# Altium PCB SignalAnalyse.PcbDoc (part 1 of 2)
Units mil, origin at the board's own origin, x right, y up, seen from the top; angles counter-clockwise.
Board outline 4784 x 1800 mil, 2 copper layers (Top Layer, Bottom Layer); 103 components, 57 nets, 390 pads, 59 vias.
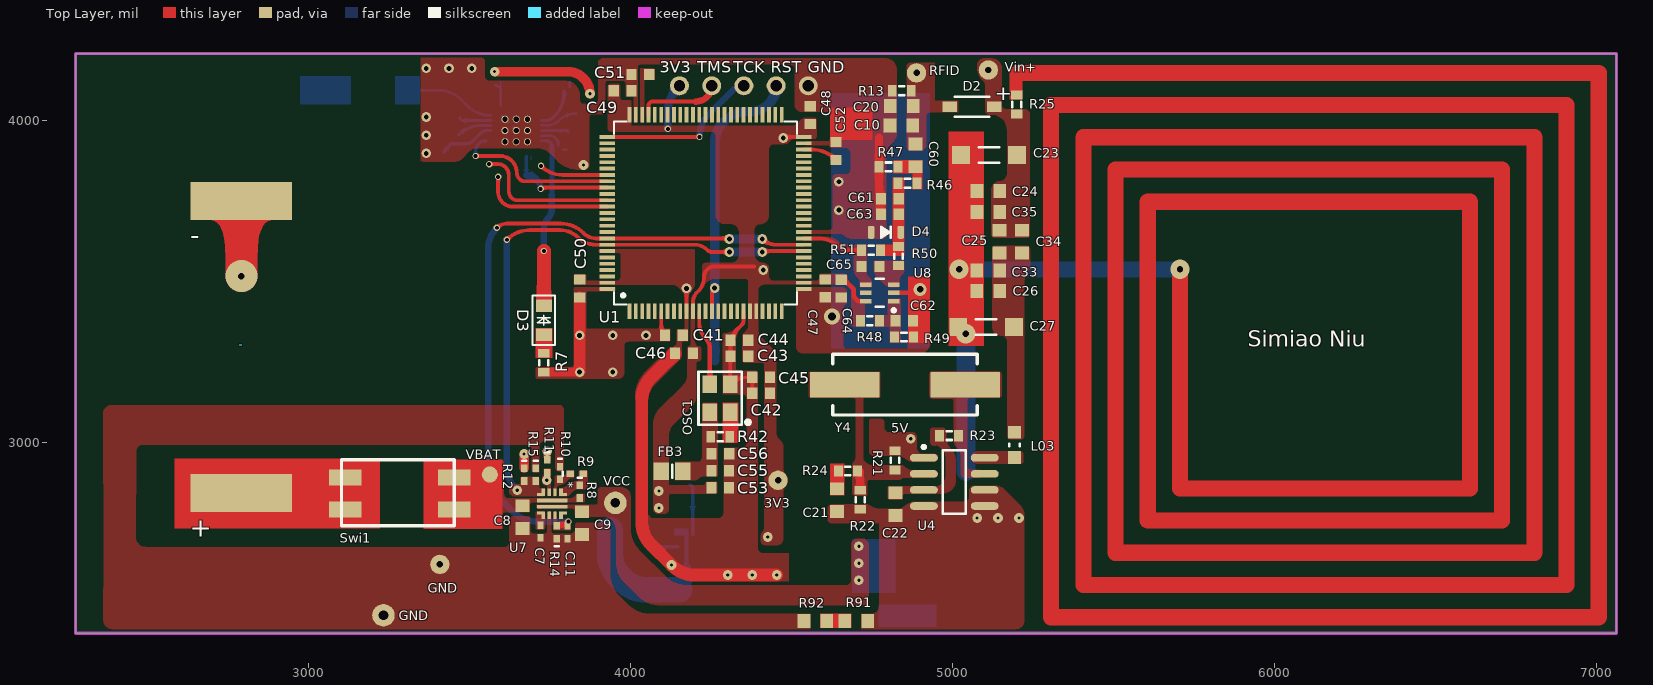
[diagram p0: Top Layer view]
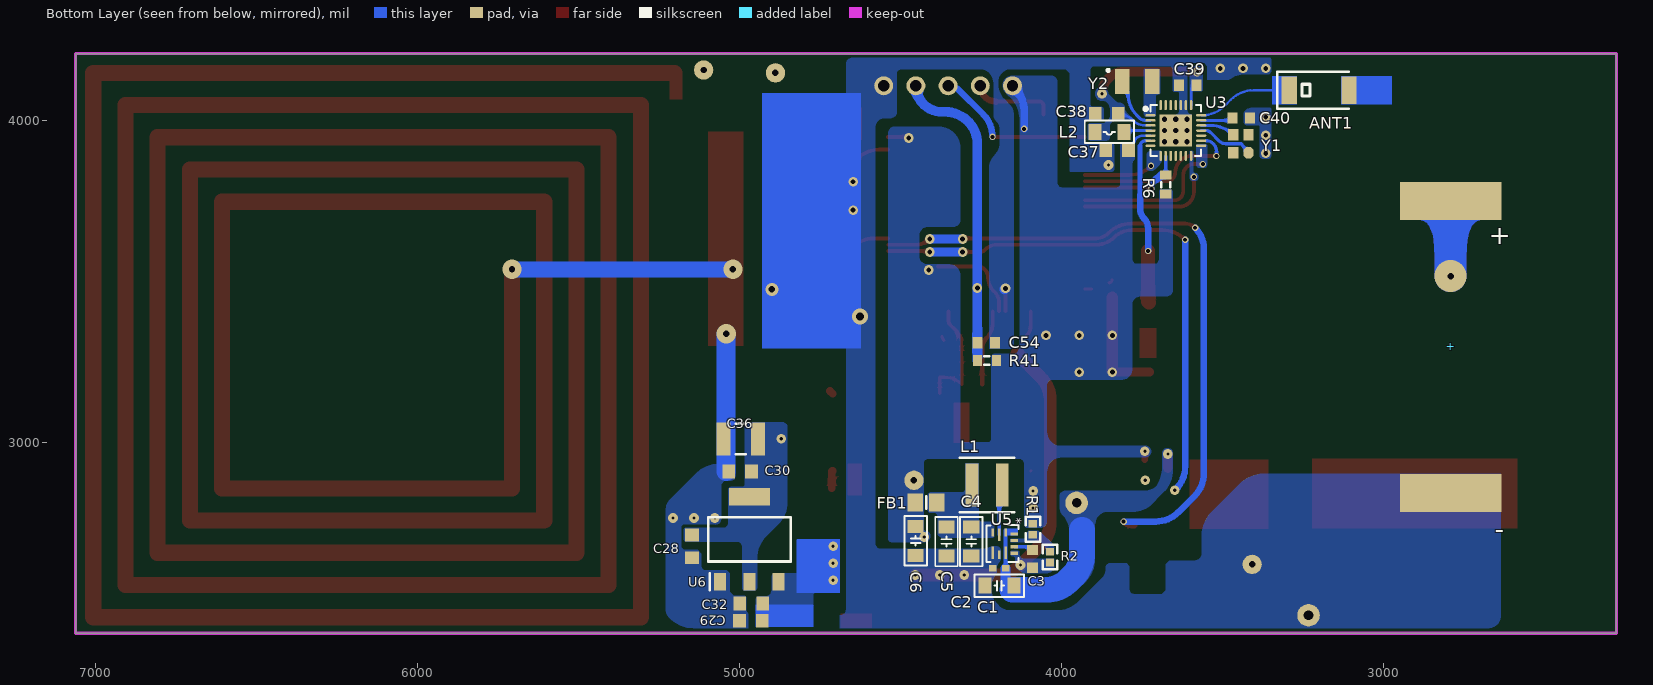
[diagram p1: Bottom Layer view, seen from below]

## Layer stack, top to bottom
Top Solder: solder mask 0.4, Solder Resist, Dk 3.5
Top Layer: signal copper 1.4
Dielectric1: dielectric 12.6, FR-4, Dk 4.8
Bottom Layer: signal copper 1.4
Bottom Solder: solder mask 0.4, Solder Resist, Dk 3.5

## Board outline
2277,2407 7061,2407 7061,4207 2277,4207

## Design rules (kind name [scope] priority, off if disabled: settings)
Clearance [All] p1: gap=3 ignorepadtopadclearanceinfootprint=FALSE except(0: Arc-Hole Track-Hole SMDPad-Hole THPad-Hole Via-Hole Fill-Hole Poly-Hole Region-Hole Text-Hole)
PlaneClearance [All] p1: clearance=15
PlaneConnect [All] p1: planeconnectstyle=Direct reliefexpansion=20 reliefentries=4 reliefconductorwidth=10 reliefairgap=10
PolygonConnect [All] p1: connectstyle=Direct reliefconductorwidth=10 reliefentries=4 polygonreliefangle="90 Angle" airgapwidth=10
RoutingVias [All] p1: holewidth=15 width=30 viastyle="Through Hole" minholewidth=8 minwidth=20 maxholewidth=50 maxwidth=80
SolderMaskExpansion [All] p1: expansion=4
Width [All] p1: maxlimit=100 minlimit=7 preferedwidth=10
28 further rules are at their usual default settings.

## Classes and differential pairs
component class SignalAnalyse: ANT1 C37 C38 C39 C40 C41 C42 C43 C44 C45 C46 C47 C48 C49 C50 C51 C52 C53 C54 C55 C56 C60 C61 C62 C63 C64 C65 D3 D4 FB3 L2 OSC1 R6 R7 R41 R42 R46 R47 R48 R49 R50 R51 U1 U3 U8 Y1 Y2
component class RFID_transmitter_V2: + - C1 C2 C3 C4 C5 C6 C7 C8 C9 C10 C11 C20 C21 C22 C23 C24 C25 C26 C27 C28 C29 C30 C32 C33 C34 C35 C36 FB1 L1 L03 R1 R2 R8 R9 R10 R11 R12 R13 R14 R15 R21 R22 R23 R24 R25 R91 R92 Swi1 U4 U5 U6 U7 Y4

## Components (designator, comment, footprint, x,y, rotation, side; value= is the part's Value field where it differs from the comment)
+ "Battery" Battery 2792,3296 r270 bottom (schematic designator BT2)
- "Battery" Battery 2792,3296 r90 top (schematic designator BT1)
ANT1 "2450AT42A100E" ANTC5020X110N 3200,4093 r180 bottom
C1 "Multilayer Ceramic Capacitor" C0805 4193,2555 r0 bottom
C2 "Cap Semi" 0402 4193.31,2609 r180 bottom
C3 "Cap Semi" 1608[0603] 4090,2638 r90 bottom
C4 "Multilayer Ceramic Capacitor" C0805 4280,2692 r270 bottom
C5 "Multilayer Ceramic Capacitor" C0805 4357,2692 r270 bottom
C6 "Multilayer Ceramic Capacitor" C0805 4453,2694 r270 bottom
C7 "Cap Semi" 0402 3720.55,2723.02 r90 top
C8 "Cap Semi" 0603 3665,2768 r90 top
C9 "Cap Semi" 0603 3849,2749 r90 top
C10 "Cap 100n" 0603 4841,3984 r180 top
C11 "Cap Semi" 0402 3804.55,2720.7 r90 top
C20 "Cap 100n" 0603 4842,4044 r180 top
C21 "Cap 820p" 0603 4641,2820.57 r90 top
C22 "Cap 200p" 0603 4822,2808 r90 top
C23 "Cap Var" Variable_Capacitor_JZ400HV1 5113,3892 r0 top
C24 "Cap" 0603 5111,3780 r0 top
C25 "Cap" 0603 5146,3623 r270 top
C26 "random value needs carefully address" 0603 5110.57,3470 r180 top
C27 "Cap Var" Variable_Capacitor_JZ400HV1 5104,3358 r0 top
C28 "Cap 100n" 0603 5147,2677 r90 bottom
C29 "Cap 10u" 0603 4964,2446 r180 bottom
C30 "Cap 22u" 0603 4998,2910 r180 bottom
C32 "Cap 10n" 0603 4963,2499 r180 bottom
C33 "random value needs carefully address" 0603 5110.57,3533 r180 top
C34 "Cap" 0603 5215,3623 r270 top
C35 "Cap" 0603 5111,3715 r0 top
C36 "C3225C0G1H104JT000N" C1210 4996,3010 r0 bottom
C37 "GRM188R61A226ME15D" 0603 3827.56,3908 r180 bottom
C38 "GRM188R61A226ME15D" 0603 3859.44,4020 r180 bottom
C39 "GRM188R61A226ME15D" 1608[0603] 3608.06,4108 r0 bottom
C40 "GRM188R61A226ME15D" 1608[0603] 3442,4007 r0 bottom
C41 "GRM188R61A226ME15D" 1608[0603] 4134.44,3333 r0 top
C42 "GRM188R61A226ME15D" 1608[0603] 4405.44,3152 r180 top
C43 "GRM188R61A226ME15D" 1608[0603] 4338,3267 r0 top
C44 "GRM188R61A226ME15D" 1608[0603] 4338,3317 r0 top
C45 "GRM188R61A226ME15D" 1608[0603] 4405.44,3202 r180 top
C46 "GRM188R61A226ME15D" 1608[0603] 4166,3276 r0 top
C47 "GRM188R61A226ME15D" 1608[0603] 4605,3478 r90 top
C48 "GRM188R61A226ME15D" 1608[0603] 4558,4016 r270 top
C49 "GRM188R61A226ME15D" 1608[0603] 3975.44,4092 r180 top
C50 "GRM188R61A226ME15D" 1608[0603] 3843,3477.44 r270 top
C51 "GRM188R61A226ME15D" 1608[0603] 4030.44,4142 r0 top
C52 "GRM188R61A226ME15D" 1608[0603] 4638,3904.44 r270 top
C53 "GRM188R61A226ME15D" 1608[0603] 4278.56,2859 r180 top
C54 "GRM188R61A226ME15D" 1608[0603] 4233.44,3309 r180 bottom
C55 "GRM188R61A226ME15D" 1608[0603] 4278.56,2912 r0 top
C56 "GRM188R61A226ME15D" 1608[0603] 4279,2964 r0 top
C60 "Cap Ceramic" 0603 4885,3891 r270 top
C61 "Cap Semi" 1608[0603] 4805,3756 r0 top
C62 "Cap Semi" 1608[0603] 4850,3377 r180 top
C63 "Cap Semi" 1608[0603] 4805,3708 r0 top
C64 "Cap Semi" 1608[0603] 4654,3477 r90 top
C65 "" 1608[0603] 4745,3546 r0 top
D2 "Diode" SOD3716X135N 5060.1,4042 r0 top
D3 "LED-Green" D0805 3731,3379 r90 top
D4 "TDZ3V0J" SOD-323 4793,3652 r0 top
FB1 "Beed" BEADC2012X110N 4420.54,2813 r0 bottom
FB3 "Bead" BEADC2012X110N 4129,2910 r180 top
L1 "XGL4030" XGL4030 4231,2868 r180 bottom
L2 "22uH" L0805 3851,3964 r0 bottom
L03 "Inductor 220 nH" Ferrite_bead_0805inch_2012mm 5192,2992 r90 top
OSC1 "16MHz" OSC_3.2X2.5 4278,3137 r90 top
R1 "14.7KΩ ±1%" LC-0402_R 4089,2730 r90 bottom
R2 "4.7KΩ ±1%" LC-0402_R 4036,2643.73 r90 bottom
R6 "Res 2.2KΩ ±1%" J1-0603 3676,3800 r90 bottom
R7 "Res 2.2KΩ ±1%" J1-0603 3731,3247 r90 top
R8 "Res 2.2KΩ ±1%" 0402-A 3842.55,2846.7 r270 top
R9 "Res 2.2KΩ ±1%" 0402-A 3833,2902 r0 top
R10 "Res 2.2KΩ ±1%" 0402-A 3780.99,2905 r270 top
R11 "Res 2.2KΩ ±1%" 0402-A 3741,2925.69 r270 top
R12 "Res 2.2KΩ ±1%" 0402-A 3669.55,2899.7 r270 top
R13 "Res 12.7KΩ ±1%" J1-0603 4842,4092 r0 top
R14 "Res 2.2KΩ ±1%" 0402-A 3770.55,2720.7 r90 top
R15 "Res 2.2KΩ ±1%" 0402-A 3705.55,2899.7 r270 top
R21 "Res 2.2KΩ ±1%" J1-0603 4821.15,2944.15 r90 top
R22 "Res 2.2KΩ ±1%" J1-0603 4713,2821.57 r90 top
R23 "Res 2.2KΩ ±1%" J1-0603 4989,3021 r0 top
R24 "Res 2.2KΩ ±1%" J1-0603 4675,2911 r180 top
R25 "Res 2.2KΩ ±1%" J1-0603 5199,4049 r90 top
R41 "Res 2.2KΩ ±1%" J1-0603 4231.47,3254 r180 bottom
R42 "Res 2.2KΩ ±1%" J1-0603 4278.47,3017 r180 top
R46 "" J1-0603 4860,3804 r180 top
R47 "" J1-0603 4801,3855 r180 top
R48 "" J1-0603 4743,3377 r180 top
R49 "" J1-0603 4849,3327 r0 top
R50 "" J1-0603 4832,3578 r90 top
R51 "" J1-0603 4747,3596 r0 top
R91 "Magnetic Beed" 0603 4701,2445 r180 top
R92 "Magnetic Beed" 0603 4574,2445 r180 top
Swi1 "Switch_219-2MSTR" Switch_219-2MSTR 3453,2841 r90 top
U1 "STM32F767VIT6" STM32F767VIT6 4233,3712 r90 top
U3 "CH9143" QFN28_4X4 3644.98,3968.03 r270 bottom
U4 "LT1016" LT1016_SOIC 5005.16,2877.15 r0 top
U5 "XPS62912RPUR" VQFN-HR10_RPU_TEX 4183.12,2685.5 r270 bottom
U6 "LT1117IST-5#PBF" SOT230P700X180-4N 4969,2699 r90 bottom
U7 "LM73100RPWR" VQFN-HR-10_2X2_TEX 3756.55,2809.54 r270 top
U8 "OPA607" OPA607IDCKR 4774,3464 r180 top
Y1 "32M" SMD2016-4N 3443,3927 r270 bottom
Y2 "32.768K" Q13FC1350000400 3765.06,4120 r180 bottom
Y4 "CRYSTAL" HC-49SMD 4852,3179 r180 top

## Footprints (in the part's own frame and the unit in brackets; to place one, negate y for a bottom-side part, rotate by r counter-clockwise, add the part's x,y. Pads: shape width x height; smd on the part's side, far side on the other; paste and mask are expansions set on the pad)
0402 [mm] "Chip Capacitor, Body 1.0x0.5mm, IPC High Density"
  rect 0.6x0.5 smd: 1(-0.5,0) 2(0.5,0)
  body extent -0.55,-0.3 0.55,0.3, height 1.3
0402-A [mm] "Chip Inductor, Body 1.0x0.5mm, IPC High Density"
  rect 0.6x0.5 smd: 1(-0.5,0) 2(0.5,0)
  silkscreen extent -1.1,-0.15 -1.1,0.15, body extent -0.55,-0.3 0.55,0.3, height 0.55
0603 [mm] "0603Resistor_Capacitor"
  rect 1x1.1 smd: 1(-0.9,0) 2(0.9,0)
  body extent -0.77,-0.45 0.77,0.45, height 0.45
1608[0603] [mm] "Chip Capacitor, Body 1.6x0.8mm, IPC High Density"
  rect 0.8x0.9 smd: 1(-0.7,0) 2(0.7,0)
  body extent -0.87,-0.48 0.87,0.48, height 1.3
ANTC5020X110N [mm]
  rect 1.2x2.2 smd: 1(-2.35,0) 2(2.35,0)
  silkscreen extent -3.3,-1.45 2.35,1.45, body extent -2.5,-1 2.5,1, height 1.1
Battery [mm]
  rect 3x8 smd: 1(-11.508,0) 2(11.508,0)
BEADC2012X110N [mm]
  rect 1.2x1.4 smd: 1(-0.85,0) 2(0.85,0)
  silkscreen extent 0,-0.5 0,0.5, body extent -1,-0.6 1,0.6, height 1.1
C0805 [mil]
  rect 40x50 smd: 1(45,0) 2(-45,0)
  silkscreen extent -77,-35 77,35, body extent -49,-24 49,25, height 31
C1210 [mm] "Chip Capacitor, Body 3.2x2.5mm, IPC High Density"
  rect 1.1x2.6 smd: 1(-1.35,0) 2(1.35,0)
  silkscreen extent -0.4,-1.2 0.4,1.2, body extent -1.7,-1.35 1.7,1.35, height 1.3
D0805 [mil]
  rect 40x50 smd: 1(-45,0) 2(45,0)
  silkscreen extent -77,-35 77,35, body extent -40,-25 40,25, height 43
Ferrite_bead_0805inch_2012mm [mm] "Ferrite_bead_MH2029-300Y"
  rect 1x1 smd: 1(-1,0) 2(1,0)
  silkscreen extent -0.1,-0.4 0.1,0.4, body extent -1.1,-0.7 1.1,0.7, height 1.1
HC-49SMD [mm] "HC49/4HSMX"
  rect 5.5x2 smd: 1(-4.75,0) 2(4.75,0)
  silkscreen extent -5.7,-2.4 5.7,2.4, body extent -6.7,-2.46 6.7,2.44, height 4.3
J1-0603 [mm] "Chip Resistor, Body 1.6x0.8mm, IPC High Density"
  rect 0.7x0.9 smd: 1(-0.75,0) 2(0.75,0)
  silkscreen extent -0.2,-0.35 0.2,0.35, body extent -0.85,-0.48 0.85,0.48, height 0.9
L0805 [mil]
  rect 40x50 smd: 1(45,0) 2(-45,0)
  silkscreen extent -77,-35 77,35, body extent -49,-24 49,25, height 31
LC-0402_R [mm]
  rect 0.6x0.65 smd mask+0.051: 1(-0.425,0) 2(0.425,0)
  silkscreen extent -0.97,-0.58 0.97,0.58, body extent -0.57,-0.27 0.57,0.28, height 0.41
LT1016_SOIC [mm] "LT1016_Comparator_SOIC"
  oval 2.2x0.6 smd: 1(-2.4,1.905) 2(-2.4,0.635) 3(-2.4,-0.635) 4(-2.4,-1.905) 5(2.4,-1.905) 6(2.4,-0.635) 7(2.4,0.635) 8(2.4,1.905)
  silkscreen extent -2.52,-2.5 0.9,2.88, body extent -2,-2.5 2,2.5, height 1.76
OPA607IDCKR [mm] "Opamp"
  rect 0.9x0.35 smd: 1(-1.1,0.65) 2(-1.1,0) 3(-1.1,-0.65) 4(1.1,-0.65) 5(1.1,0) 6(1.1,0.65)
  silkscreen extent -1.23,-1.1 0.3,1.5, body extent -0.7,-1.1 0.7,1.1, height 1.1
OSC_3.2X2.5 [mm] "SG-310SCF SMD-3225_4P"
  rect 1.4x1.15 smd: 1(-1.1,-0.8) 2(1.1,-0.8) 3(1.1,0.8) 4(-1.1,0.8)
  silkscreen extent -2.1,-2.35 2.1,1.7, body extent -1.6,-1.25 1.6,1.25, height 0.61
Q13FC1350000400 [mm] "FC-135, 2-Leads, Body 1.50x3.20mm, Pitch 2.35mm, IPC Medium Density"
  rect 1.15x1.95 smd: 1(-1.175,0) 2(1.175,0)
  silkscreen extent -2.39,0.79 -2.19,0.99, body extent -1.67,-0.9 1.68,0.9, height 0.9
QFN28_4X4 [mm]
  round 0.559 hole 0.406: 0(-0.888,-0.89) 0(-0.888,-0.002) 0(-0.888,0.885) 0(0.001,-0.89) 0(0.001,-0.002) 0(0.001,0.885) 0(0.89,-0.89) 0(0.89,-0.002) 0(0.89,0.885)
  rect 2.54x2.54 smd: 0(0,0)
  oval 0.2x0.8 smd: 1(-1.2,-2) 2(-0.8,-2) 3(-0.4,-2) 4(0,-2) 5(0.4,-2) 6(0.8,-2) 7(1.2,-2) 15(1.2,2) 16(0.8,2) 17(0.4,2) 18(0,2) 19(-0.4,2) 20(-0.8,2) 21(-1.2,2)
  oval 0.8x0.2 smd: 8(2,-1.2) 9(2,-0.8) 10(2,-0.4) 11(2,0) 12(2,0.4) 13(2,0.8) 14(2,1.2) 22(-2,1.2) 23(-2,0.8) 24(-2,0.4) 25(-2,0) 26(-2,-0.4) 27(-2,-0.8) 28(-2,-1.2)
  silkscreen extent -2,-2.51 2,2
SMD2016-4N [mm]
  oct 0.9x0.8 smd: 1(0.7,0.6)
  rect 0.9x0.8 smd: 2(-0.7,0.6) 3(-0.7,-0.6) 4(0.7,-0.6)
  body extent -0.85,-1 0.85,1, height 0.5
SOD3716X135N [mm]
  rect 1.15x0.8 smd: 1(-1.75,0) 2(1.75,0)
  silkscreen extent -1.35,-0.8 1.35,0.8, body extent -1.86,-0.8 1.86,0.8, height 1.35
SOD-323 [mil]
  rrect50% 20x40 smd: 1(-46,0) 2(46,0)
  silkscreen extent -16,-18 16,18, body extent -51,-27 51,27, height 43
SOT230P700X180-4N [mm]
  rect 1.35x0.95 smd: 1(-3.35,2.3) 2(-3.35,0) 3(-3.35,-2.3)
  rect 1.35x3.25 smd: 4(3.35,0)
  silkscreen extent -4.03,-3.25 1.75,3.25, body extent -3.5,-3.25 3.5,3.25, height 1.8
STM32F767VIT6 [mm] "LQPF100, 100-Leads, Body 14.00x14.00mm, Pitch 0.50mm, IPC Medium Density"
  rect 1.2x0.3 smd: 1(-7.75,6) 2(-7.75,5.5) 3(-7.75,5) 4(-7.75,4.5) 5(-7.75,4) 6(-7.75,3.5) 7(-7.75,3) 8(-7.75,2.5) 9(-7.75,2) 10(-7.75,1.5) 11(-7.75,1) 12(-7.75,0.5) 13(-7.75,0) 14(-7.75,-0.5) 15(-7.75,-1) 16(-7.75,-1.5) 17(-7.75,-2) 18(-7.75,-2.5) 19(-7.75,-3) 20(-7.75,-3.5) 21(-7.75,-4) 22(-7.75,-4.5) 23(-7.75,-5) 24(-7.75,-5.5) 25(-7.75,-6) 51(7.75,-6) 52(7.75,-5.5) 53(7.75,-5) 54(7.75,-4.5) 55(7.75,-4) 56(7.75,-3.5) 57(7.75,-3) 58(7.75,-2.5) 59(7.75,-2) 60(7.75,-1.5) 61(7.75,-1) 62(7.75,-0.5) 63(7.75,0) 64(7.75,0.5) 65(7.75,1) 66(7.75,1.5) 67(7.75,2) 68(7.75,2.5) 69(7.75,3) 70(7.75,3.5) 71(7.75,4) 72(7.75,4.5) 73(7.75,5) 74(7.75,5.5) 75(7.75,6)
  rect 0.3x1.2 smd: 26(-6,-7.75) 27(-5.5,-7.75) 28(-5,-7.75) 29(-4.5,-7.75) 30(-4,-7.75) 31(-3.5,-7.75) 32(-3,-7.75) 33(-2.5,-7.75) 34(-2,-7.75) 35(-1.5,-7.75) 36(-1,-7.75) 37(-0.5,-7.75) 38(0,-7.75) 39(0.5,-7.75) 40(1,-7.75) 41(1.5,-7.75) 42(2,-7.75) 43(2.5,-7.75) 44(3,-7.75) 45(3.5,-7.75) 46(4,-7.75) 47(4.5,-7.75) 48(5,-7.75) 49(5.5,-7.75) 50(6,-7.75) 76(6,7.75) 77(5.5,7.75) 78(5,7.75) 79(4.5,7.75) 80(4,7.75) 81(3.5,7.75) 82(3,7.75) 83(2.5,7.75) 84(2,7.75) 85(1.5,7.75) 86(1,7.75) 87(0.5,7.75) 88(0,7.75) 89(-0.5,7.75) 90(-1,7.75) 91(-1.5,7.75) 92(-2,7.75) 93(-2.5,7.75) 94(-3,7.75) 95(-3.5,7.75) 96(-4,7.75) 97(-4.5,7.75) 98(-5,7.75) 99(-5.5,7.75) 100(-6,7.75)
  silkscreen extent -7.23,-7.23 7.23,7.23, body extent -8,-8 8,8, height 1.6
Switch_219-2MSTR [mil]
  rect 50x100 smd: 1(-50,0) 2(50,0) 3(-50,339) 4(50,339)
  silkscreen extent -100,0 105,350
Variable_Capacitor_JZ400HV1 [mm] "Variable_Capacitor_JZ400HV"
  rect 1.4x1.4 smd: 1(-2.2,0) 2(2.2,0)
  silkscreen extent -0.8,-0.6 0.8,0.6, body extent -3.3,-1.72 3.05,1.73, height 1.45
VQFN-HR10_RPU_TEX [mil]
  rect 26x8 smd paste-4 mask+0: 1(-34.5,9.88) 3(-34.5,-29.62) 5(34.5,-9.88)
  rect 39x8 smd: 2(-28,-9.87) 4(28,-29.63) 6(28,9.87)
  rect 10x22 smd: 7(29.63,36.37) 8(9.88,36.38) 9(-9.87,36.38) 10(-29.62,36.38)
  silkscreen extent -57,-50 57,50, body extent -41,-40 41,40, height 39
VQFN-HR-10_2X2_TEX [mm]
  rrect17% 0.6x0.3 smd paste+0 mask+0.05: 1(-0.9,0.7) 4(-0.9,-0.7) 7(0.9,-0.7) 10(0.9,0.7)
  rrect20% 0.25x0.6 smd paste+0 mask+0.05: 1(-0.725,0.875) 4(-0.725,-0.875) 7(0.725,-0.875) 10(0.725,0.875)
  rrect20% 0.6x0.25 smd paste+0 mask+0.05: 2(-0.9,0.225) 3(-0.9,-0.225) 8(0.9,-0.225) 9(0.9,0.225)
  rrect17% 0.3x2.4 smd paste+0 mask+0.05: 5(-0.25,0) 6(0.25,0)
  body extent -1,-1 1,1, height 1
XGL4030 [mm] "Precision Wire Wound Inductor, 2-Leads, Body 4.00x4.00mm, IPC Medium Density"
  rect 1x3.4 smd: 1(-1.185,0) 2(1.185,0)
  silkscreen extent -2.15,-2.15 2.15,2.15, body extent -2.15,-2.15 2.15,2.15, height 3

## Part data
+ -: "Multicell Battery"
ANT1: "Antenna"
C1 C4 C5 C6 C60: library part C-Ceramic
C2 C3 C9 C61 C62 C63 C64: "Capacitor (Semiconductor SIM Model)"
C7: "多层陶瓷电容器MLCC - SMD/SMT 1.3nF 50VDC X7R 5% 0402"
C8: "多层陶瓷电容器MLCC - SMD/SMT 0603 1uF 25V X6S 10%"
C10 C20: library part "Cap Semi", "Capacitor"
C11: "多层陶瓷电容器MLCC - SMD/SMT 100nF 10VDC X5R 5% 0402"
C21 C22 C28 C29 C30 C32: library part Cap, "Capacitor"
C23 C27: "Variable or Adjustable Capacitor"
C24 C25 C34 C35: "Capacitor_for resonance"
C26 C33: library part Cap, "Capacitor_for resonance"
C36 C37 C38 C39 C40 C41 C42 C43 C44 C45 C46 C47 C48 C49 C50 C51 C52 C53 C54 C55 C56 C65: library part "Cap Semi", "Capacitor (Semiconductor SIM Model)"
D2: library part MBR0540T1G, "Surface Mount Schottky Power Rectifier"
D3: library part LED
D4: library part "D Zener", "Zener Diode 3V"
FB1 FB3: library part 782853200, "Wurth Ferrite Bead"
L1: library part Inductor, "Coilcraft Shielded Power Inductors"
L2: library part FB
L03: library part Component_1, "220nH"
OSC1: library part OSC2, "OSC with disable function"
R1 R2: library part "0402 1KΩ (1001) 1%", "贴片电阻"
R6 R7 R8 R9 R10 R11 R12 R14 R15 R21 R22 R23 R24 R25 R41 R42 R46 R47 R48 R49 R50 R51: library part Res1, "Resistor"
R13: library part Res3, "Resistor"
R91 R92: library part Res1, "Wurth Magnetic Bead"
U3: "Bluetooth-LowEnergy & UART & USB Mutual Transport"
U5 U7: "No Description Available"
U8: library part TSV620AILT
Y1: library part X201632MMB4SI, "Quartz Crystal Oscillator"
Y2: library part Q13FC1350000400, "Crystal Oscillator"
Y4: "Industry standard SMD crystal"

## Free pads (board coordinates)
  round 70 hole 30: 0(3233,2463) 0(3953,2812)
  round 60 hole 20: 0(3408,2621) 0(4458,2882) 2(4888,4147) 2(5111,4156)
  round 59.06 hole 35.43: 1(4152,4107) 2(4252,4107) 3(4352,4107) 4(4452.01,4107) 5(4552.01,4107)
  round 50 smd: 2(3563,2900)

## Via types
v1: diameter 30, hole 15, Top Layer to Bottom Layer, tented both sides, 21 vias
v2: diameter 30, hole 10, Top Layer to Bottom Layer, tented both sides, 19 vias
v3: diameter 20, hole 12, Top Layer to Bottom Layer, tented both sides, 11 vias
v4: diameter 60, hole 20, Top Layer to Bottom Layer, 3 vias
v5: diameter 30, hole 10, Top Layer to Bottom Layer, 2 vias
v6: diameter 40, hole 20, Top Layer to Bottom Layer, 1 vias
v7: diameter 50, hole 25, Top Layer to Bottom Layer, 1 vias
v8: diameter 100, hole 20, Top Layer to Bottom Layer, 1 vias

## Nets (pads, with @x,y where several pads share a name; then routed paths per layer and width w, separated by ;. In a path a pad name is that pad's centre, name@x,y a point inside that pad or via, vN(x,y) a via of type N, cw(c..) or ccw(c..) an arc to the next point about the centre after c; other vN are vias at no path point)
3.3V: C6.2 C37.2 C41.1 C42.1 C43.2 C44.2 C45.1 C46.2 C47.2 C48.2 C49.2 C50.2 C53.2 C64.2 FB1.2 FB3.2 pad.0@4458,2882 pad.1 R1.2 R6.1 R7.1 R11.1 R41.2 R48.2 U1.6 U1.11 U1.20 U1.21 U1.27 U1.50 U1.75 U1.100 U3.5 U8.6 | length 1169.8
  Top Layer w10: U1.100@3905.52,3475.78 U1.100@3927.88,3475.78 ; FB3.2@4095,2912 FB3.2@4096,2911 ; C44.2@4365.56,3317 ccw(c4352.92,3329.64) C44.2@4370.8,3329.64
  Top Layer w11.81: U1.6@4095.2,3406.88 4095.2,3361.19 ccw(c4135.07,3361.19) C41.1@4106.88,3333 ; U1.11@4193.63,3406.88 4193.63,3433.72 cw(c4239.28,3433.72) 4207,3466 4210.32,3469.32 ccw(c4167.64,3512) 4228,3512 cw(c4262,3512) 4262,3546 4383,3546
  Top Layer w12: v1(4474,3945) cw(c4477.22,3945) 4477.22,3948.22 U1.50@4538.12,3948.22
  Top Layer w13.78: C64.2@4666,3502 4693,3475 4693,3452 4706.59,3438.41 U8.6@4730.69,3438.41
  Top Layer w20: R11.1@3741,2945.37 v2(3741,2972)
  Top Layer w27.56: R7.1@3726,3218.53 v1@3840.73,3218.53
  Top Layer w35.43: v1@3840.73,3218.53 ccw(c3835.24,3224.02) 3843,3224.02 C50.2@3843,3449.88
  Bottom Layer w8: U3.5@3723.72,3952.28 3747.72,3952.28 cw(c3747.72,3924) 3776,3924 C37.2@3776,3923 ; C37.2@3792,3908 C37.2@3800,3908
  Bottom Layer w23.62: v3(4116,3973) 4116,4029.58 cw(c4216,4029.58) 4145.29,4100.29 pad.1@4152,4107
  other v1: 3842,3218 3945,3218 3842,3332 3945,3332 4048,3332 4412,3535
  other v2: 4426,2706 4088,2796 4088,2849
ADC: C65.1 R51.1 U1.34 U8.4 | length 189.3
  Top Layer w11.81: U1.34@4538.12,3633.26 4582.6,3633.26 cw(c4582.6,3543.6) 4646,3607 ccw(c4672.56,3633.56) 4672.56,3596 R51.1@4717.47,3596
ANT: ANT1.1 U3.21 | length 297.3
  Bottom Layer w7.32: ANT1.1@3292.52,4093 3403.58,4093 cw(c3403.58,3993) 3474.29,4063.71 3493.44,4044.56 ccw(c3564.15,4115.28) 3564.15,4015.28 U3.21@3566.24,4015.28
BT_AT: U1.82 U3.8 | length 224.9
  Top Layer w11.81: v3(3722,3858) ccw(c3789.33,3925.33) 3789.33,3830.11 U1.82@3927.88,3830.11
  Bottom Layer w0: U3.8@3692.22,3877.78 U3.8@3692.22,3889.29
BT_RST: U1.83 U3.16 | length 519.9
  Top Layer w11.81: v3(3519,3889) 3595,3889 cw(c3595,3837) 3647,3837 ccw(c3673.57,3837) 3673.57,3810.43 U1.83@3927.88,3810.43
  Bottom Layer w10: v3(3519,3889) 3519,3903.93 cw(c3551.61,3903.93) 3519.47,3909.46 cw(c3551.61,3903.93) 3547.12,3936.23 cw(c3551.61,3903.93) U3.16@3551.61,3936.54
BT_RXD: U1.86 U3.15 | length 453.1
  Top Layer w11.81: v3(3561,3864) 3588,3864 cw(c3588,3830) 3622,3830 3622,3779 ccw(c3649.63,3779) 3640.28,3753 ccw(c3649.63,3779) 3649.63,3751.37 U1.86@3927.88,3751.37
BT_STA: R6.2 U1.84 U3.9 | length 337.7
  Top Layer w11.81: v3(3721,3787) 3724.74,3790.74 U1.84@3927.88,3790.74
  Bottom Layer w8: R6.2@3676,3829.53 R6.2@3676.48,3830
  Bottom Layer w10: R6.2@3676.48,3830 U3.9@3676.48,3889.29
  Bottom Layer w19.68: R6.2@3676,3829.53 3678.47,3829.53 cw(c3678.47,3787) v3(3721,3787)
BT_TXD: U1.87 U3.14 | length 411.7
  Top Layer w11.81: v3(3589,3824) 3589,3777 ccw(c3634.31,3777) 3634.31,3731.69 U1.87@3927.88,3731.69
FB: R1.1 R2.2 U5.9
GND: +.2 C1.1 C2.1 C3.1 C4.1 C5.1 C6.1 C7.1 C8.1 C9.1 C10.2 C11.1 C20.2 C37.1 C38.1 C39.2 C40.1 C41.2 C42.2 C43.1 C44.1 C45.2 C46.1 C47.1 C48.1 C49.1 C50.1 C51.1 C52.1 C53.1 C54.2 C55.2 C56.2 C61.1 C62.1 C63.1 C64.1 D4.1 OSC1.2 pad.0@3233,2463 pad.0@3408,2621 pad.5 R2.1 R10.1 R13.1 R14.1 R15.1 R47.2 R49.2 R92.2 U1.10 U1.19 U1.26 U1.35 U1.49 U1.74 U1.94 U1.99 U3.0 U3.23 U3.24 U5.4 U5.5 U5.7 U7.8 U8.2 | length 1755
  Top Layer w10: C50.1@3843,3505 ccw(c3852.54,3505) C50.1@3852.54,3495.46 ; C44.1@4310.44,3317 C43.1@4310.44,3267 ccw(c4312.72,3264.72) 4309.5,3264.72 OSC1.2@4309.5,3180.31 cw(c4361.87,3127.94) 4361.87,3202 C45.2@4377.88,3202 C42.2@4377.88,3152 C42.2@4378,3151.88
  Top Layer w11.81: U1.10@4173.94,3406.88 4173.94,3477.94 v1(4174,3478)
  Top Layer w12: C44.1@4310.44,3317 cw(c4325.99,3317) C44.1@4315,3328 ; C44.1@4321,3330 cw(c4345.14,3330) 4328.06,3347.06 4345.24,3364.24 ccw(c4331.08,3378.41) 4351.11,3378.41 U1.19@4351.11,3406.88 ; C52.1@4634.54,3928.54 ccw(c4634.54,3932) C52.1@4638,3932
  Top Layer w25: C61.1@4771.47,3753.97 R47.2@4771.47,3855 4771.47,3946.47 ; C63.1@4774.44,3709.56 C61.1@4774.44,3751
  Top Layer w40: C46.1@4138.44,3276 4064.29,3201.85 ccw(c4135,3131.14) 4035,3131.14 4035,2752.42 ccw(c4135,2752.42) 4064.29,2681.71 v2(4127,2619) 4128.71,2617.29 ccw(c4199.42,2688) 4199.42,2588 v2(4302,2588) v2(4378,2588) v2(4454,2588)
  Bottom Layer w31.5: v1(4174,3478) v1@4176.59,3475.41
  other v1: 4647,3721 4647,3809 3366,3897 3366,3953.5 3366,4010 3366,4161 3436.5,4161 3507,4161
  other v2: 3854,3861
  other v6: 4899,3475
  other v7: 4625,3391
GND_RF: C21.1 C22.1 C23.1 C24.1 C26.2 C27.1 C28.1 C29.1 C30.1 C32.1 C33.2 C35.1 C36.2 R22.1 R25.2 R91.1 U4.4 U4.5 U4.6 U6.1 | length 26907
  Top Layer w50: 5201,4147 7006,4147 7006,2457 5306,2457 5306,4047 6906,4047 6906,2557 5406,2557 5406,3947 6806,3947 6806,2657 5506,2657 5506,3847 6706,3847 6706,2757 5606,2757 5606,3747 6606,3747 6606,2857 5706,2857 v4(5706,3537)
  Bottom Layer w50: v4(5020,3537) v4(5706,3537)
  Bottom Layer w60: C30.1@5041.43,2910 v4@5041.43,3336
  other v2: 5076,2765 5141,2765 5206,2765
  other v4: 5041,3337
IMON: C11.2 R14.2 U1.33 U1.92 U7.9 | length 2106.5
  Top Layer w11.81: v3(3585,3666) cw(c3616.38,3634.62) 3616.38,3679 3783.58,3679 cw(c3783.58,3579) 3854.29,3649.71 3855,3649 ccw(c3893,3687) 3893,3633.26 U1.92@3927.88,3633.26 4301.54,3633.26 cw(c4301.54,3625.54) v1(4307,3631) ; v1(4409,3631) ccw(c4451.07,3673.07) 4451.07,3613.57 U1.33@4538.12,3613.57
  Top Layer w20: R14.2@3774,2743 3780.44,2743 ccw(c3780.44,2780.56) v3(3807,2754)
  Bottom Layer w20: v3(3585,3666) ccw(c3650.18,3600.82) 3558,3600.82 3558,2903.42 ccw(c3658,2903.42) 3587.29,2832.71 3636.71,2783.29 ccw(c3707.42,2854) 3707.42,2754 v3(3807,2754)
  Bottom Layer w27.56: v1(4307,3631) v1(4409,3631)
NetBT1_1: -.1 Swi1.3 Swi1.4 | length 21.2
  Top Layer w30: -.1@2792,2862.93 -.1@2807,2847.93
NetBT1_2: +.1 -.2 | length 426.1
  Top Layer w100: v8(2792,3516) -.2@2792,3729.07
  Bottom Layer w100: v8(2792,3516) +.1@2792,3729.07
NetC3_2: C3.2 U5.8 | length 62.5
  Bottom Layer w10: C3.2@4090,2665.56 cw(c4100.07,2665.56) 4100.07,2675.62 U5.8@4146.75,2675.62
NetC4_2: C4.2 C5.2 FB1.1 L1.1 U5.3
NetC7_2: C7.2 U7.7
NetC21_2: C21.2 R24.2
NetC22_2: C22.2 R23.1 U4.3
NetC25_2: C25.2 C26.1 C27.2 C33.1 C34.2 L03.2
NetC40_2: C40.2 U3.20 | length 99.8
  Bottom Layer w8: C40.2@3469.56,4007 C40.2@3477.03,3999.53
  Bottom Layer w10: C40.2@3477.03,3999.53 U3.20@3566.24,3999.53
NetC51_2: C51.2 U1.73
NetC52_2: C52.2 U1.48 | length 108.8
  Top Layer w10: C52.2@4635.32,3879.56 C52.2@4638,3876.88
  Top Layer w11.81: U1.48@4538.12,3908.85 4564.61,3908.85 cw(c4564.61,3808.85) C52.2@4635.32,3879.56
NetC55_1: C55.1 C56.1 FB3.1 OSC1.4 R42.2
NetC60_2: C60.2 R46.1 R47.1
NetC61_2: C61.2 C63.2 D4.2 R46.2 R50.2 R51.2
NetC62_2: C62.2 R48.1 R49.1 U8.1
NetC65_2: C65.2 R50.1 U8.3
NetD3_1: D3.1 R7.2
NetD3_2: D3.2 U3.6 | length 535.2
  Top Layer w44: D3.2@3728,3434 3731,3437 v3(3731,3594)
  Bottom Layer w8: U3.6@3723.72,3936.54 U3.6@3738.46,3936.54
  Bottom Layer w10: U3.6@3738.46,3936.54 cw(c3738.46,3919) 3756,3919
  Bottom Layer w16: 3756,3769 3756,3919
  Bottom Layer w20: v3(3731,3594) 3731,3665 cw(c3772.04,3665) 3743.02,3694.02 ccw(c3711.69,3725.36) 3756,3725.36 3756,3769
NetL1_2: L1.2 U5.2 | length 159.4
  Bottom Layer w8: L1.2@4184.35,2868 cw(c4184.35,2859.35) L1.2@4193,2859.35
  Bottom Layer w12: U5.2@4193,2713.5 L1.2@4193,2859.35
NetL2_2: L2.2 U3.4 | length 84.6
  Bottom Layer w8: U3.4@3723.72,3968.03 3801.97,3968.03 cw(c3801.97,3964) L2.2@3806,3964
NetL03_1: L03.1 U4.8
NetOSC1_1: OSC1.1 R42.1
NetOSC1_3: OSC1.3 U1.12 | length 235.4
  Top Layer w11.81: U1.12@4213.31,3406.88 4213.31,3370.52 ccw(c4280.52,3370.52) 4233,3323
  Top Layer w14: 4233,3323 cw(c4200.4,3290.4) 4246.5,3290.4 OSC1.3@4246.5,3180.31
NetR8_1: R8.1 R9.2 U7.1
NetR9_1: R9.1 R10.2 U7.2
NetR21_1: R21.1 R22.2 R24.1 U4.2 Y4.2 | length 67.6
  Top Layer w24: R24.1@4710.43,2911 cw(c4710.43,2908.43) 4713,2908.43 4713,2904.77 R22.2@4713,2857 ; Y4.2@4710.43,3150.43 Y4.2@4719,3159
NetR23_2: R23.2 U4.7 Y4.1
NetR91_2: R91.2 R92.1
NetU3_1: U3.1 Y2.2
NetU3_2: U3.2 Y2.1 | length 149
  Bottom Layer w8: Y2.1@3811.32,4101.75 Y2.1@3811.32,4120
  Bottom Layer w10: U3.2@3723.72,3999.53 3738.55,3999.53 ccw(c3738.55,4028.45) 3759,4008 3764.71,4013.71 ccw(c3694,4084.42) 3794,4084.42 Y2.1@3794,4091
NetU3_18: U3.18 Y1.1 | length 175.2
  Bottom Layer w8: Y1.1@3419.38,3899.44 Y1.1@3419.38,3899.8
  Bottom Layer w10: Y1.1@3419.38,3899.44 3442.13,3926.87 ; 3442,3927 3491,3927 ccw(c3491,3953.56) 3509.78,3934.78 3537,3962 cw(c3551.56,3947.44) 3551.56,3968.03 U3.18@3566.24,3968.03
NetU3_19: U3.19 Y1.3 | length 107.4
  Bottom Layer w10: Y1.3@3466.62,3954.56 cw(c3537.17,3884.02) 3537.17,3983.78 U3.19@3566.24,3983.78
PG: R11.2 U7.3
  other v5: 3740,2882
PGTH: R12.2 R15.2 U1.32 U1.93 U7.4 | length 1737
  Top Layer w11.81: v3(3616,3629) 3616.71,3629.71 cw(c3687.42,3559) 3687.42,3659 3781.47,3659 cw(c3781.47,3580.47) 3837,3636 ccw(c3891.14,3690.14) 3891.14,3613.57 U1.93@3927.88,3613.57 4199.4,3613.57 cw(c4199.4,3560.4) 4237,3598 ccw(c4253.9,3614.9) 4253.9,3591 v1(4307,3591) ; v1(4409,3591) cw(c4411.89,3591) 4411.89,3593.89 U1.32@4538.12,3593.89
  Bottom Layer w20: v3(3616,3629) 3616,2924.42 ccw(c3716,2924.42) 3645.29,2853.71 v2(3648,2851)
  Bottom Layer w27.56: v1(4307,3591) v1(4409,3591)
R\S\T\: C54.1 pad.4 R41.1 U1.14 | length 1040.7
  Top Layer w11.81: U1.14@4252.68,3406.88 4252.68,3458.93 cw(c4281.07,3458.93) v1(4261,3479)
  Bottom Layer w30: R41.1@4261,3254 C54.1@4261,3309 v1(4261,3479) 4261,3926 cw(c4361,3926) 4361,4026 4371.01,4026 ccw(c4371.01,4107) pad.4@4452.01,4107
RFID: C10.1 C20.1 C60.1 D2.1 pad.2@4888,4147 R13.2
TCK: pad.3 U1.76 | length 507.6
  Top Layer w11.81: U1.76@3927.88,3948.22 v3(4214.22,3948.22)
  Bottom Layer w20: v3(4214.22,3948.22) cw(c4313.18,3948.22) 4243.18,4018.17 ; 4243.21,4018.2 4317.87,4092.86 cw(c4352,4058.73) pad.3@4352,4107
TMS: pad.2@4252,4107 U1.72 | length 259.4
  Top Layer w11.81: U1.72@4055.83,4017.12 4055.83,4044.83 cw(c4069,4044.83) 4069,4058 4203,4058
  Top Layer w20: 4203,4058 ccw(c4203,4107) pad.2@4252,4107
UD+: U3.12
UD-: U3.13
VBAT: C8.2 pad.2@3563,2900 R8.2 Swi1.1 Swi1.2 U7.5
VCC_5_RF: C28.2 C30.2 C36.1 R21.2 U4.1 U6.2 U6.4
  other v5: 4870,3011
Vcc_un: C1.2 C2.2 C9.2 C29.2 C32.2 pad.0@3953,2812 R12.1 U5.1 U5.6 U5.10 U6.3 U7.6 | length 581.1
  Top Layer w30: R12.1@3669.55,2919.39 v2(3669.55,2963.55)
  Bottom Layer w8: C2.2@4173.25,2609 C2.2@4173.63,2609
  Bottom Layer w12: C2.2@4173.25,2609 U5.6@4173.25,2657.5 U5.1@4173.25,2727
  Bottom Layer w30: C2.2@4173.63,2609 4173.63,2555.55 ccw(c4188.55,2555.55) 4178,2545
  Bottom Layer w80: 3936,2728.58 3936,2654.42 ccw(c4036,2654.42) 3965.29,2583.71 3977.71,2571.29 ccw(c4048.42,2642) 4048.42,2542 C1.2@4153,2542
  other v2: 4709,2572 4709,2624.5 4709,2677
VDD_A: C38.2 C39.1 L2.1 U3.3 U3.22 | length 524.3
  Top Layer w30: v2(3578,4151) 3805,4151 cw(c3805,4082) v2(3874,4082)
  Bottom Layer w8: C39.1@3580.51,4108 cw(c3580.51,4090.77) 3597.74,4090.77 U3.22@3597.74,4046.77 ; U3.3@3723.72,3983.78 3740.25,3983.78 ccw(c3740.25,4035.75) 3777,3999 cw(c3827.7,3948.3) 3827.7,4020 C38.2@3831.88,4020
Vin+: C23.2 C24.2 C25.1 C34.1 C35.2 D2.2 pad.2@5111,4156 R25.1
pads on no net: ANT1.2 U1.1 U1.2 U1.3 U1.4 U1.5 U1.7 U1.8 U1.9 U1.13 U1.15 U1.16 U1.17 U1.18 U1.22 U1.23 U1.24 U1.25 U1.28 U1.29 U1.30 U1.31 U1.36 U1.37 U1.38 U1.39 U1.40 U1.41 U1.42 U1.43 U1.44 U1.45 U1.46 U1.47 U1.51 U1.52 U1.53 U1.54 U1.55 U1.56 U1.57 U1.58 U1.59 U1.60 U1.61 U1.62 U1.63 U1.64 U1.65 U1.66 U1.67 U1.68 U1.69 U1.70 U1.71 U1.77 U1.78 U1.79 U1.80 U1.81 U1.85 U1.88 U1.89 U1.90 U1.91 U1.95 U1.96 U1.97 U1.98 U3.7 U3.10 U3.11 U3.17 U3.25 U3.26 U3.27 U3.28 U7.10 U8.5 Y1.2 Y1.4

## Polygon pours and split planes (outlines as drawn)
GND on Top Layer "Top Layer-GND 1" (solid, pour order 206): 4514,3482 4514,3297 ccw(c4534,3297) 4534,3277 4898,3277 ccw(c4898,3309) 4928.98,3317 4861,3317 4861,3297 cw(c4855,3297) 4855,3291 4672,3291 cw(c4672,3302) 4661,3302 4661,3415.34 cw(c4674.66,3415.34) 4665,3425 4669.17,3429.17 ccw(c4662.34,3436) 4672,3436 4672,3466 ccw(c4656,3466) 4656,3482
3.3V on Top Layer "Top Layer-3.3V 4" (solid, pour order 204): 4686,3367 ccw(c4694,3367) 4694,3359 4727,3359 4727,3435 ccw(c4717,3435) 4717,3445 cw(c4717,3463) 4699,3463 4699,3473 4686,3473
GND on Top Layer "Top Layer-GND 6" (solid, pour order 202): 4701,3632 4683.9,3632 cw(c4683.9,3655.9) 4667,3639 ccw(c4647.69,3619.69) 4647.69,3647 4514,3647 4514,3659 4673,3659 ccw(c4673,3669) 4683,3669 4701,3669
no net on Top Layer "Top Layer-No Net 3" (solid, pour order 200): 4683,3632
NetC62_2 on Top Layer "Top Layer-NetC62_2" (solid, pour order 198): 4839,3309 4805,3309 4805,3359 4758,3359 4758,3395 4799,3395 4799,3446 4839,3446
NetC65_2 on Top Layer "Top Layer-NetC65_2" (solid, pour order 196): 4835,3482 4804.49,3482 cw(c4804.49,3502.49) 4790,3488 4765.61,3512.39 cw(c4791.21,3538) 4755,3538 4755,3564 4850,3564 4850,3534 cw(c4830.69,3534) 4844.34,3520.34 4843,3519 ccw(c4862.31,3499.69) 4835,3499.69
ADC on Top Layer "Top Layer-ADC" (solid, pour order 194): 4733,3528 ccw(c4749.9,3528) 4737.95,3516.05 4743.34,3510.66 cw(c4729.69,3497) 4749,3497 4749,3482 4712,3482 4712,3498 ccw(c4697.52,3498) 4707.76,3508.24 4702,3514 cw(c4723.73,3535.73) 4693,3535.73 4693,3577 ccw(c4680,3577) 4680,3590 cw(c4680,3647.94) 4639.03,3606.97 ccw(c4588.26,3556.2) 4588.26,3628 4578,3628 4578,3639 4609.79,3639 cw(c4609.79,3587.79) 4646,3624 ccw(c4670.14,3648.14) 4670.14,3614 4733,3614
RFID on Top Layer "Top Layer-RFID" (solid, pour order 160): 5000,4024 5017,4024 5017,4060 4975,4060 4900,4060 ccw(c4900,4043) 4883,4043 4883,3954 4918.33,3954 4918,4011 cw(c4931,4011) 4931,4024
RFID on Top Layer "Top Layer-RFID" (solid, pour order 159): 4857.36,4118.95 4857,4118.95 4857,3916 ccw(c4868,3916) 4868,3905 4901,3905 ccw(c4901,3922) 4918,3922 4918,4027 cw(c4945,4027) 4945,4054 4945,4179 4870,4179.18 ccw(c4870,4166.18) 4857,4166.18
GND on Top Layer "Top Layer-GND 2" (solid, pour order 145): 3694,2977 ccw(c3680,2977) 3680,2991.01 2485.85,2992.15 ccw(c2485.85,2971.15) 2464.85,2971.15 2464.21,2705.21 ccw(c2494.21,2705.21) 2494.21,2675.21 3610,2675 ccw(c3610,2689) 3624,2689 3624,2763 3632,2771 3684,2771 3689,2766 3689,2724 3697,2716 3736,2716 3742,2722 3742,2784 3744,2786 3752,2786 3754,2784 3754,2722 3760,2716 3817.01,2716 3828.19,2726.95 3828.19,2746.19 3832,2750 3920,2750 cw(c3920,2733) 3937,2733 3937,2590.18 ccw(c4029.18,2590.18) 3964,2525 3992.71,2496.29 ccw(c4063.42,2567) 4063.42,2467 4558,2467 4558,2420 2392,2420 cw(c2392,2449) 2363,2449 2363.78,2649 2363.56,3092.44 cw(c2385.56,3092.44) 2385.56,3114.44 3784.34,3114.34 3792.34,3106.34 3792.02,2930 3792.02,2917.02 cw(c3785,2917.02) 3785,2910 3777,2910 cw(c3777,2920) 3767,2920 3767,2990 ccw(c3754,2990) 3754,3003 3732,3003 ccw(c3732,2987) 3716,2987 3716,2910 cw(c3712,2910) 3712,2906 3699,2906 cw(c3699,2911) 3694,2911
no net on Top Layer "Top Layer-No Net" (solid, pour order 130): 4557,3206
3.3V on Top Layer "3.3V_L01_P016" (solid, pour order 133): 4284,3122
3.3V on Top Layer "3.3V_L01_P018" (solid, pour order 134): 4284,3122
3.3V on Top Layer "3.3V_L01_P014" (solid, remove dead copper, pour order 132): 4429.08,3711 4429.08,3703.08 cw(c4403,3703.08) 4403,3677 ccw(c4403,3658) 4384,3658 4384,3585.75 ccw(c4412,3585.75) 4412,3557.75 cw(c4412,3540.75) 4429,3540.75 4429.19,3512 4429.19,3510.05 cw(c4410.14,3510.05) 4410.14,3491 4372,3491 cw(c4372,3498) 4365,3498 ccw(c4355,3498) 4355,3508 4266.38,3508 ccw(c4266.38,3463.62) 4235,3495 4230.41,3490.41 ccw(c4233.83,3487) 4229,3487 4216,3487 ccw(c4201.52,3501.48) 4222,3501.49 4222,3545 cw(c4235,3545) 4235,3558 4314,3558 ccw(c4314,3581) 4337,3581 4337,3652 ccw(c4311,3652) 4311,3678 4292,3678 cw(c4292,3706) 4264,3706 4264,3835 4264,3952 ccw(c4252.01,3952) 4252,3964 3941,3964 cw(c3941,3975.99) 3929,3976 3929,4104 cw(c3939,4104) 3939,4114 3960,4114 cw(c3960,4106) 3968,4106 3968,4070 ccw(c3976,4070) 3976,4062 3998,4062 cw(c3998,4057) 4003,4057 4003,3997 4003,3983 4022,3983 4137,3983 4446,3983 4480,3983 4495.69,3983 ccw(c4495.69,4021.68) 4523.04,3994.33 ccw(c4528.67,3999.95) 4528.67,3992 4537,3992 4537,3944.22 cw(c4534.49,3944.22) 4536.26,3942.44 4506.5,3942.44 ccw(c4506.49,3932.76) 4499.64,3939.6 4490.02,3929.98 cw(c4478,3942) 4478,3925 4444,3925 ccw(c4444,3910) 4429,3910 4429,3859
NetC51_2 on Top Layer "NETC51_2_L01_P010" (solid, remove dead copper, pour order 131): 4030,3992 4040,3992 ccw(c4040,3994) 4042,3994 4042,4121 cw(c4045,4121) 4045,4124 4074,4124 ccw(c4074,4125) 4075,4125 4075,4160 ccw(c4073,4160) 4073,4162 4030,4162
3.3V on Top Layer "3.3V_L01_P072" (solid, pour order 138): 4570,3942 ccw(c4570,3950) 4578,3950 4578,4000 ccw(c4571,4000) 4571,4007 4544,4007 ccw(c4544,3983) 4520,3983 cw(c4506,3983) 4506,3969 4470,3969 4458,3957 4458,3943 ccw(c4473,3943) 4473,3928 4481,3928 4495,3942
GND on Top Layer "GND_L01_P024" (solid, remove dead copper, pour order 136): 4290,3339 ccw(c4290,3389.7) 4325.85,3353.85 4332,3360 4341,3351 ccw(c4374.8,3317.2) 4327,3317.2 4327,3227 4332,3222 4389,3222 4395,3216 4395,2674 ccw(c4414,2674) 4414,2655 4492,2655 4492,2568 4198.42,2568 cw(c4198.42,2668) 4127.71,2597.29 4070.29,2654.71 cw(c4141,2725.42) 4041,2725.42 4041,2775 4055,2775 4066,2764 4271,2764 ccw(c4271,2782) 4289,2782 4289,2980 4292,2983 4346,2983 ccw(c4346,2998) 4361,2998 4361,3006 4361,3135 ccw(c4346,3135) 4346,3150 4286,3150 4286,3335
no net on Top Layer "Top Layer-No Net 1" (solid, pour order 140): 5083,3597
NetR23_2 on Top Layer "Top Layer-NetR23_1 1" (solid, pour order 141): 5045,3126 cw(c5057,3126) 5057,3138 5143,3138 ccw(c5143,3147) 5152,3147 5152,3211 ccw(c5142,3211) 5142,3221 4937,3221 ccw(c4937,3211) 4927,3211 4927,3148 ccw(c4940,3148) 4940,3135 4995,3135 cw(c4995,3126) 5004,3126 5004,3005.66 ccw(c5031.31,3005.66) 5012,2986.34 cw(c4980.62,2954.96) 5025,2954.96 5025,2902.34 ccw(c5037,2902.34) 5037,2890.34 5080,2890.34 ccw(c5080,2898.34) 5088,2898.34 5088,2908.34 ccw(c5082,2908.34) 5082,2914.34 5061,2914.34 5058.66,2914.34 cw(c5058.66,2928) 5045,2928
NetC22_2 on Top Layer "Top Layer-NetC22_2" (solid, pour order 142): 4854,2840 ccw(c4854,2830) 4844,2830 4844,2825 cw(c4841,2825) 4841,2822 4804,2822 cw(c4804,2827) 4799,2827 4799,2860 cw(c4803,2860) 4803,2864 4945.86,2864 ccw(c4945.86,2898.14) 4970,2874 ccw(c4950.69,2893.31) 4978,2893.31 4978,2953 ccw(c4944.2,2953) 4968.1,2976.9 4960,2985 ccw(c4947.93,2972.93) 4947.93,2990 4940,2990 cw(c4940,2999) 4931,2999 4931,3042 cw(c4934,3042) 4934,3045 4969,3045 cw(c4969,3033) 4981,3033 4981,3016 ccw(c5038.94,3016) 4997.97,2975.03 4998,2975 cw(c4971.44,2948.44) 5009,2948.44 5009,2881.97 cw(c4968.03,2881.97) 4997,2853 cw(c4965.62,2884.38) 4965.62,2840
no net on Top Layer "Top Layer-NetR23_1" (solid, pour order 143): 4907,3049
no net on Top Layer "NONET_L01_P074" (solid, remove dead copper, pour order 139): 5088,2560
VCC_5_RF on Top Layer "Top Layer-VCC_5_RF" (solid, pour order 154): 4908.5,2964 cw(c4908.5,2984.5) 4888,2984.5 4888,3018 ccw(c4875,3018) 4875,3031 4804,3031 cw(c4803.5,3046.5) 4788,3046 4788,3062 ccw(c4777,3062) 4777,3073 4747,3073 ccw(c4747,3067) 4741,3067 4741,2970 ccw(c4752,2970) 4752,2959 4827.03,2959 cw(c4827.03,2918.03) 4856,2947 ccw(c4872.9,2963.9) 4872.9,2940 4942,2940 ccw(c4942,2952) 4954,2952 ccw(c4942,2952) 4942,2964
NetR21_1 on Top Layer "Top Layer-NetR21_1" (solid, pour order 155): 4849.24,2890 ccw(c4849.24,2879.76) 4842,2887 cw(c4834.76,2894.24) 4834.76,2884 4742,2884 ccw(c4742,2877) 4735,2877 4735,2839 cw(c4730,2839) 4730,2834 4698,2834 cw(c4698,2843) 4689,2843 4689,2930.34 cw(c4702.66,2930.34) 4693,2940 ccw(c4678.51,2954.49) 4699,2954.49 4699,3130 ccw(c4690,3130) 4690,3139 4559,3139 cw(c4559,3145) 4553,3145 4553,3214 cw(c4558,3214) 4558,3219 4771,3219 cw(c4771,3215) 4775,3215 4775,3143 cw(c4771,3143) 4771,3139 4729,3139 ccw(c4729,3132) 4722,3132 4722,2951.66 ccw(c4735.66,2951.66) 4726,2942 4727,2941 ccw(c4755.97,2969.97) 4755.97,2929 4838.51,2929 cw(c4838.51,2908.51) 4853,2923 ccw(c4874.73,2944.73) 4874.73,2914 4942,2914 cw(c4942,2902) 4954,2902 cw(c4942,2902) 4942,2890
NetL03_1 on Top Layer "Top Layer-NetL03_1" (solid, pour order 156): 5056,2952 ccw(c5075,2952) 5075,2933 5211,2933 ccw(c5211,2942) 5220,2942 5220,2963 ccw(c5210,2963) 5210,2973 5077,2973 ccw(c5077,2952)
NetC25_2 on Top Layer "Top Layer-NetC25_2" (solid, pour order 157): 5177,3010 cw(c5177,3017) 5170,3017 5170,3311 ccw(c5150,3311) 5150,3331 cw(c5150,3358) 5123,3358 5123,3603 cw(c5130,3603) 5130,3610 5229,3610 cw(c5229,3598) 5241,3598 5241,3545.07 cw(c5223.93,3545.07) 5236,3533 ccw(c5267.38,3501.62) 5223,3501.62 5223,3019 cw(c5214,3019) 5214,3010
Vin+ on Top Layer "Top Layer-Vin+" (solid, pour order 158): 5167,4034 cw(c5167,4049) 5152,4049 5152,4119.86 5152,4164.1 ccw(c5128.1,4164.1) 5145,4181 5141.78,4184.22 ccw(c5123,4165.45) 5123,4192 5097,4192 ccw(c5097,4172) 5077,4172 5077,4160 ccw(c5125.28,4160) 5091.14,4125.86 5096.05,4120.95 cw(c5084.1,4109) 5101,4109 5101,4032 ccw(c5116,4032) 5116,4017 5121,4017 cw(c5121,3969) 5169,3969 5169,3833 cw(c5147,3833) 5147,3811 ccw(c5147,3784) 5120,3784 5120,3647 ccw(c5132,3647) 5132,3635 5231,3635 ccw(c5231,3644) 5240,3644 5240,4018 ccw(c5224,4018) 5224,4034
GND on Top Layer "Top Layer-GND 5" (solid, pour order 162): 3348,4191 cw(c3351,4191) 3351,4194 3537,4194 cw(c3537,4184) 3547,4184 3547,4138 ccw(c3562,4138) 3562,4123 3797,4123 cw(c3797,4078) 3842,4078 3842,4064 ccw(c3855,4064) 3855,4051 3885,4051 ccw(c3885,4066) 3900,4066 3900,4178 cw(c3914,4178) 3914,4192 4001,4192 cw(c4001,4170) 4023,4170 4023,3993 4010,3993 4010,4069 ccw(c4006,4069) 4006,4073 3989,4073 cw(c3989,4077) 3985,4077 3985,4113 ccw(c3976,4113) 3976,4122 3929,4122 ccw(c3929,4114) 3921,4114 3921,4029 cw(c3912.03,4028.99) 3920.54,4026.15 cw(c3913.69,4025.84) 3914,4019 3884,4019 ccw(c3884,4007) 3872,4007 3872,3859 cw(c3859,3859) 3859,3846 3841.42,3846 cw(c3841.42,3946) 3770.71,3875.29 3749.26,3896.74 ccw(c3710,3857.48) 3710,3913 3522,3913 ccw(c3522,3884.03) 3501.51,3904.51 3478,3881 cw(c3453.86,3905.14) 3453.86,3871 3356,3871 cw(c3356,3879) 3348,3879
GND on Top Layer "Top Layer-GND 4" (solid, pour order 163): 4156.36,3259.64 4073.58,3176.85 ccw(c4118.43,3132) 4055,3132 4015,3132 4015,3146.24 cw(c4115,3146.24) 4044.29,3216.95 4120.17,3292.83 cw(c4123,3290) 4123,3294 4127,3294 ccw(c4127,3303.66) 4133.83,3296.83 4141.88,3304.88 ccw(c4136.76,3310) 4144,3310 4144,3347 cw(c4148,3347) 4148,3351 4162,3351 ccw(c4162,3357) 4168,3357 4168,3431 4180,3431 4180,3317 cw(c4176,3317) 4176,3313 4164,3313 ccw(c4164,3308) 4159,3308 4159,3266 cw(c4150,3266)
GND on Top Layer "Top Layer-GND 3" (solid, pour order 164): 4126.86,3489 cw(c4126.86,3454.86) 4151,3479 4158.1,3471.9 cw(c4134.2,3448) 4168,3448 4180,3448 cw(c4213.8,3448) 4189.9,3471.9 4191.51,3473.51 ccw(c4171.03,3494) 4200,3494 4200,3594 ccw(c4194,3594) 4194,3600 3941,3600 3904,3600 ccw(c3904,3597) 3901,3597 3901,3591 ccw(c3904,3591) 3904,3588 3964,3588 cw(c3964,3583) 3969,3583 3969,3513 cw(c3958,3513) 3958,3502 3867,3502 cw(c3867,3507) 3862,3507 3862,3519 ccw(c3859,3519) 3859,3522 3826,3522 ccw(c3826,3519) 3823,3519 3823,3492 ccw(c3826,3492) 3826,3489
3.3V on Top Layer "Top Layer-3.3V 1" (solid, pour order 175): 4474,2845 cw(c4500.56,2845) 4481.78,2863.78 4482,2864 ccw(c4467.51,2878.49) 4488,2878.49 4488,2885.1 ccw(c4464.1,2885.1) 4481,2902 cw(c4497.9,2918.9) 4474,2918.9 4474,2921 4474,2990 ccw(c4454.69,2990) 4468.34,3003.66 4458.66,3013.34 cw(c4472.31,3027) 4453,3027 4453,3260.61 ccw(c4408.62,3260.62) 4440,3292 4407.61,3324.39 cw(c4433.21,3350) 4397,3350 4397,3431 4365,3431 4365,3358 cw(c4352.93,3358) 4361.46,3349.46 4350.54,3338.54 ccw(c4359.07,3330) 4347,3330 4347,3255 ccw(c4355,3255) 4355,3247 4407,3247 cw(c4407,3239) 4415,3239 4415,2735 cw(c4398.1,2735) 4410.05,2723.05 4409,2722 ccw(c4418.66,2712.34) 4405,2712.34 4405,2692.24 ccw(c4415.24,2692.24) 4408,2685 ccw(c4417.66,2694.66) 4417.66,2681 4455,2681 ccw(c4455,2700) 4474,2700
no net on Top Layer "Top Layer-No Net 2" (solid, pour order 176): 3735,3202
3.3V on Top Layer "Top Layer-3.3V 3" (solid, pour order 178): 4660.35,3489 ccw(c4660.35,3516.84) 4680.03,3497.15 cw(c4700.56,3514) 4674,3514 ccw(c4664,3514) 4664,3524 4595,3524 ccw(c4595,3515) 4586,3515 4586,3512 cw(c4576,3512) 4576,3502 4439,3502 4429,3512 4429,3548 4425,3552 4352,3552 4352,3540 4356.02,3540 4365.02,3531 4365.02,3427 4396,3427 ccw(c4396,3428) 4397,3428 4397,3472.07 cw(c4413.93,3472.07) 4413.93,3489
GND on Top Layer "Top Layer-GND 7" (solid, pour order 179): 4628,3671 cw(c4616,3671) 4616,3659 4606,3659 4606,3647 cw(c4609.5,3647) 4609.5,3650.5 4701,3650.5 4701,3632 4785,3632 ccw(c4785,3641) 4794,3641 4794,3897 cw(c4825.38,3897) 4803.19,3919.19 4817,3933 ccw(c4795.27,3954.73) 4826,3954.73 4826,4158 ccw(c4792,4158) 4792,4192 4001,4192 ccw(c4001,4176) 3985,4176 3985,4150 4019,4150 ccw(c4019,4153) 4022,4153 4022,4166 cw(c4029,4166) 4029,4173 4496,4173 cw(c4496,4159) 4510,4159 4510,4047 ccw(c4530,4047) 4530,4027 4703,4027 cw(c4703,4007) 4723,4007 4723,3960 cw(c4713,3960) 4713,3950 4628,3950 ccw(c4628,3941) 4619,3941 cw(c4612,3941) 4612,3934 4546,3934 4546,3923 4614,3923 cw(c4614,3919) 4618,3919 ccw(c4622,3919) 4622,3915 4665,3915 cw(c4665,3897) 4683,3897 4683,3847 cw(c4669,3847) 4669,3833 4638,3833 ccw(c4638,3823) 4628,3823
NetC55_1 on Top Layer "NETC55_1_L01_P022" (solid, remove dead copper, pour order 135): 4213.76,2888.87 cw(c4197.16,2905.47) 4197.16,2882 4139,2882 4139,2939 4208,2939 ccw(c4208,2953) 4222,2953 4222,3121 cw(c4224,3121) 4224,3123 4268,3123 cw(c4268,3120) 4271,3120 4271,2897 cw(c4268,2897) 4268,2894 4224.66,2894 ccw(c4224.66,2880.34) 4215,2890
3.3V on Top Layer "Top Layer-3.3V 2" (solid, pour order 174): 4119,2832 cw(c4127,2832) 4127,2840 4264,2840 ccw(c4264,2845) 4269,2845 4269,2874 ccw(c4265,2874) 4265,2878 4238,2878 ccw(c4238,2872) 4232,2872 cw(c4227,2872) 4227,2867 4123,2867 cw(c4123,2871) 4119,2871 4119,3022 cw(c4167.78,3020.79) 4134.14,3056.14 4190.56,3112.56 ccw(c4158.13,3145) 4204,3145 4204,3244 cw(c4212,3244) 4212,3252 ccw(c4212,3259) 4219,3259 4219,3292 ccw(c4213,3292) 4213,3298 cw(c4213,3311) 4200,3311 4200,3424 4187,3424 4187,3305 cw(c4180,3305) 4180,3298 4179,3298 ccw(c4179,3295) 4176,3295 4176,3207 cw(c4137.38,3207) 4164.69,3179.69 4162.5,3176.5 4091.51,3105.51 ccw(c4141.01,3056) 4071,3056 4071,2791 ccw(c4083,2791) 4083,2779 4107,2779 ccw(c4107,2791) 4119,2791
Vcc_un on Top Layer "Top Layer-Vcc_un" (solid, pour order 146): 3708,2806 3891,2806 ccw(c3891,2814) 3899,2814 3899,2851 cw(c3908,2851) 3908,2860 3973,2860 cw(c3973,2833) 4000,2833 4000,2734.42 ccw(c4100,2734.42) 4029.29,2663.71 4107.71,2585.29 ccw(c4178.42,2656) 4178.42,2556 4668,2556 ccw(c4668,2574) 4686,2574 4686,2685 cw(c4701,2685) 4701,2700 4724,2700 cw(c4724,2685) 4739,2685 4739,2508 cw(c4725,2508) 4725,2494 4092.42,2494 cw(c4092.42,2594) 4021.71,2523.29 3981,2564 cw(c4043.77,2626.77) 3955,2626.77 3955,2727.86 ccw(c3913.86,2727.87) 3913.86,2769 3833,2769 cw(c3833,2775) 3827,2775 3827,2788 ccw(c3822,2788) 3822,2793 3708,2793
3.3V on Top Layer "Top Layer-3.3V" (solid, pour order 177): 3964,3198 ccw(c3964,3214) 3980,3214 3980,3299 cw(c3994,3299) 3994,3313 4118,3313 ccw(c4118,3319) 4124,3319 4124,3348 ccw(c4119,3348) 4119,3353 4111,3353 cw(c4111,3363) 4101,3363 4089,3363 4089,3358 cw(c4084,3358) 4084,3353 3868,3353 cw(c3868,3359) 3862,3359 3862,3461 cw(c3870,3461) 3870,3469 3950,3469 ccw(c3950,3472) 3953,3472 3953,3479 ccw(c3950,3479) 3950,3482 3830,3482 ccw(c3830,3476) 3824,3476 3824,3245 cw(c3812,3245) 3812,3233 3710,3233 ccw(c3710,3228) 3705,3228 3705,3202 ccw(c3709,3202) 3709,3198
NetC7_2 on Top Layer "NETC7_2_L01_P188" (solid, remove dead copper, pour order 185): 3728,2729 ccw(c3728,2736) 3735,2736 3735,2780 ccw(c3729,2780) 3729,2786 3712,2786 ccw(c3712,2779) 3705,2779 3705,2736 ccw(c3712,2736) 3712,2729
IMON on Top Layer "NETC11_2_L01_P190" (solid, remove dead copper, pour order 186): 3761,2786 ccw(c3761,2785) 3760,2785 3760,2730 ccw(c3763,2730) 3763,2727 3812,2727 ccw(c3812,2730) 3815,2730 3815,2751 ccw(c3813,2751) 3813,2753 3775,2753 cw(c3775,2757) 3771,2757 3771,2784 ccw(c3769,2784) 3769,2786
NetR8_1 on Top Layer "NETR8_1_L01_P194" (solid, remove dead copper, pour order 188): 3863,2913 cw(c3863,2909) 3867,2909 3867,2861 cw(c3860,2861) 3860,2854 3836.49,2854 ccw(c3836.49,2833.52) 3822,2848 3811.24,2837.24 cw(c3801,2847.49) 3801,2833 3779,2833 cw(c3779,2834) 3778,2834 3778,2856 cw(c3779,2856) 3779,2857 ccw(c3779,2890.8) 3802.9,2866.9 3805,2869 cw(c3829.14,2844.86) 3829.14,2879 3833,2879 ccw(c3833,2885) 3839,2885 3839,2909 cw(c3843,2909) 3843,2913
VBAT on Top Layer "VBAT_L01_P196" (solid, pour order 189): 3561,2942 cw(c3565,2942) 3565,2946 3601,2946 cw(c3601,2940) 3607,2940 3607,2841.5 ccw(c3622.5,2841.5) 3622.5,2826 3665,2826 3810.1,2826 ccw(c3810.1,2849.89) 3827,2833 3832.88,2838.88 cw(c3837.99,2833.77) 3838,2841 3853,2841 cw(c3853,2836) 3858,2836 3858,2817 cw(c3854,2817) 3854,2813 3694,2813 ccw(c3694,2806) 3687,2806 3687,2801.5 3687,2785 cw(c3685,2785) 3685,2783 3608,2783 ccw(c3608,2777) 3602,2777 cw(c3597,2777) 3597,2772 3564,2772 cw(c3564,2775) 3561,2775
PG on Top Layer "PG_L01_P200" (solid, pour order 190): 3753,2916 ccw(c3750,2916) 3750,2919 3734,2919 ccw(c3734,2915) 3730,2915 3730,2901.83 cw(c3723.17,2901.83) 3728,2897 ccw(c3732.83,2892.17) 3726,2892.17 3726,2876 ccw(c3735,2876) 3735,2867 3738,2867 cw(c3738,2863) 3742,2863 3742,2835 ccw(c3744,2835) 3744,2833 3753,2833
PGTH on Top Layer "PGTH_L01_P202" (solid, pour order 191): 3638,2833 cw(c3638,2848) 3623,2848 3623,2856 cw(c3637,2856) 3637,2870 3652,2870 ccw(c3652,2876) 3658,2876 3658,2888 cw(c3663,2888) 3663,2893 3713,2893 cw(c3713,2890) 3716,2890 3716,2862 ccw(c3721,2862) 3721,2857 3733,2857 cw(c3733,2855) 3735,2855 3735,2835 cw(c3733,2835) 3733,2833
NetR9_1 on Top Layer "NETR9_1_L01_P192" (solid, remove dead copper, pour order 187): 3764,2889 3764,2891 cw(c3771,2891) 3771,2898 3792.5,2898 ccw(c3792.5,2905.5) 3800,2905.5 3800,2910 cw(c3802,2910) 3802,2912 3825,2912 3825,2889 3821,2889 ccw(c3821,2867.28) 3805.64,2882.64 3797.07,2874.07 cw(c3780,2891.14) 3780,2867 ccw(c3780,2857.35) 3773.17,2864.17 ccw(c3778.12,2859.05) 3771,2859.17 3771,2835 cw(c3769,2835) 3769,2833 3762,2833 cw(c3762,2835) 3760,2835 3760,2854.17 cw(c3766.83,2854.17) 3762,2859 ccw(c3757.17,2863.83) 3764,2863.83
GND_RF on Top Layer "Top Layer-GND 2" (solid, pour order 144): 4745,2467 4717,2467 4717,2420 5197,2420 ccw(c5197,2445) 5222,2445 5222,2762 4772,2762 4772,2494 cw(c4745,2494)
GND_RF on Top Layer "Top Layer-GND" (solid, pour order 161): 4624,2748 cw(c4624,2759) 4613,2759 4613,2796 cw(c4625.5,2795.5) 4626,2808 4737,2808 4753.63,2799.11 4769.23,2793 4826.03,2793 ccw(c4826.03,2833.97) 4855,2805 4857.93,2807.93 4875,2815 5036,2815 ccw(c5036,2831) 5052,2831 5052,2851 cw(c5066,2851) 5066,2865 5141,2865 5156.36,2858.64 5214.93,2800.07 5222,2783 5222,2763.24 5219,2756 cw(c5199.69,2775.31) 5199.69,2748
3.3V on Bottom Layer "3.3V_L02_P070" (solid, remove dead copper, pour order 137): 4315,3519 cw(c4349,3519) 4349,3553 4417,3553 ccw(c4417,3578) 4442,3578 4442,3643 ccw(c4416,3643) 4416,3669 4336,3669 cw(c4336.5,3690.5) 4315,3691 4315,3916 cw(c4378,3916) 4378,3979 4520,3979 cw(c4520,3961) 4538,3961 4538,2967 4301,2967 cw(c4301,2978) 4290,2978 4290,2989 cw(c4301,2989) 4301,3000 ccw(c4301,3014) 4315,3014
NetC4_2 on Bottom Layer "Bottom Layer-NetC4_2" (solid, pour order 147): 4257,2935 4257,2764 cw(c4246,2764) 4246,2753 4219,2753 ccw(c4219,2742) 4208,2742 4208,2710 ccw(c4214,2710) 4214,2704 4370,2704 ccw(c4370,2718) 4384,2718 4384,2768 cw(c4398,2768) 4398,2782 4409,2782 ccw(c4409,2788) 4415,2788 4415,2836 ccw(c4406,2836) 4406,2845 4310,2845 cw(c4310,2856) 4299,2856 4299,2935